# EAGLE board MagSwitch (EAGLE 7.6.0)
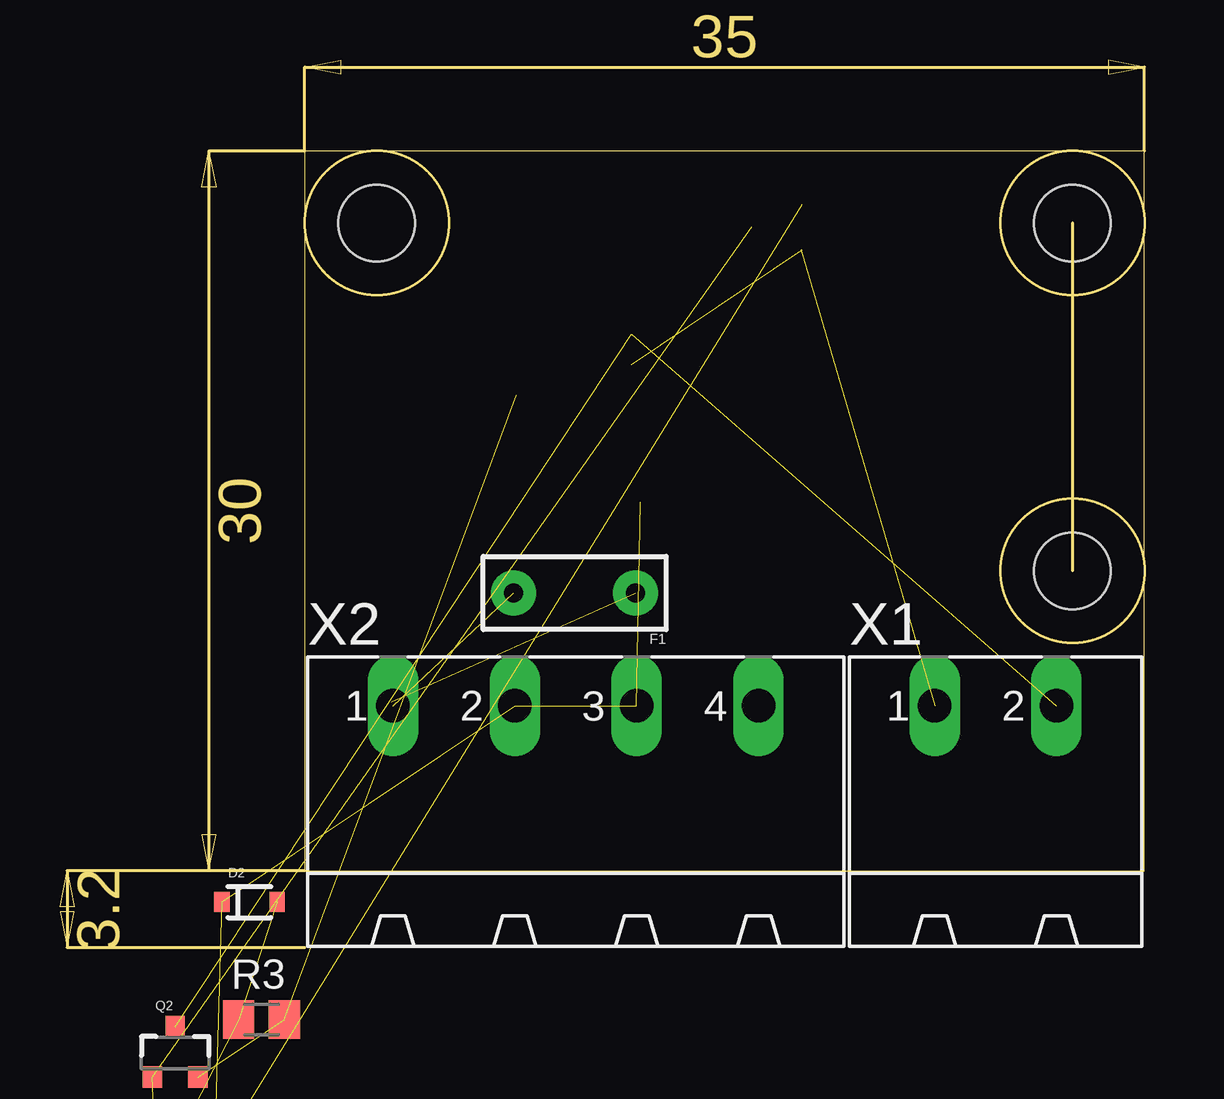
[diagram p0: board, top side]
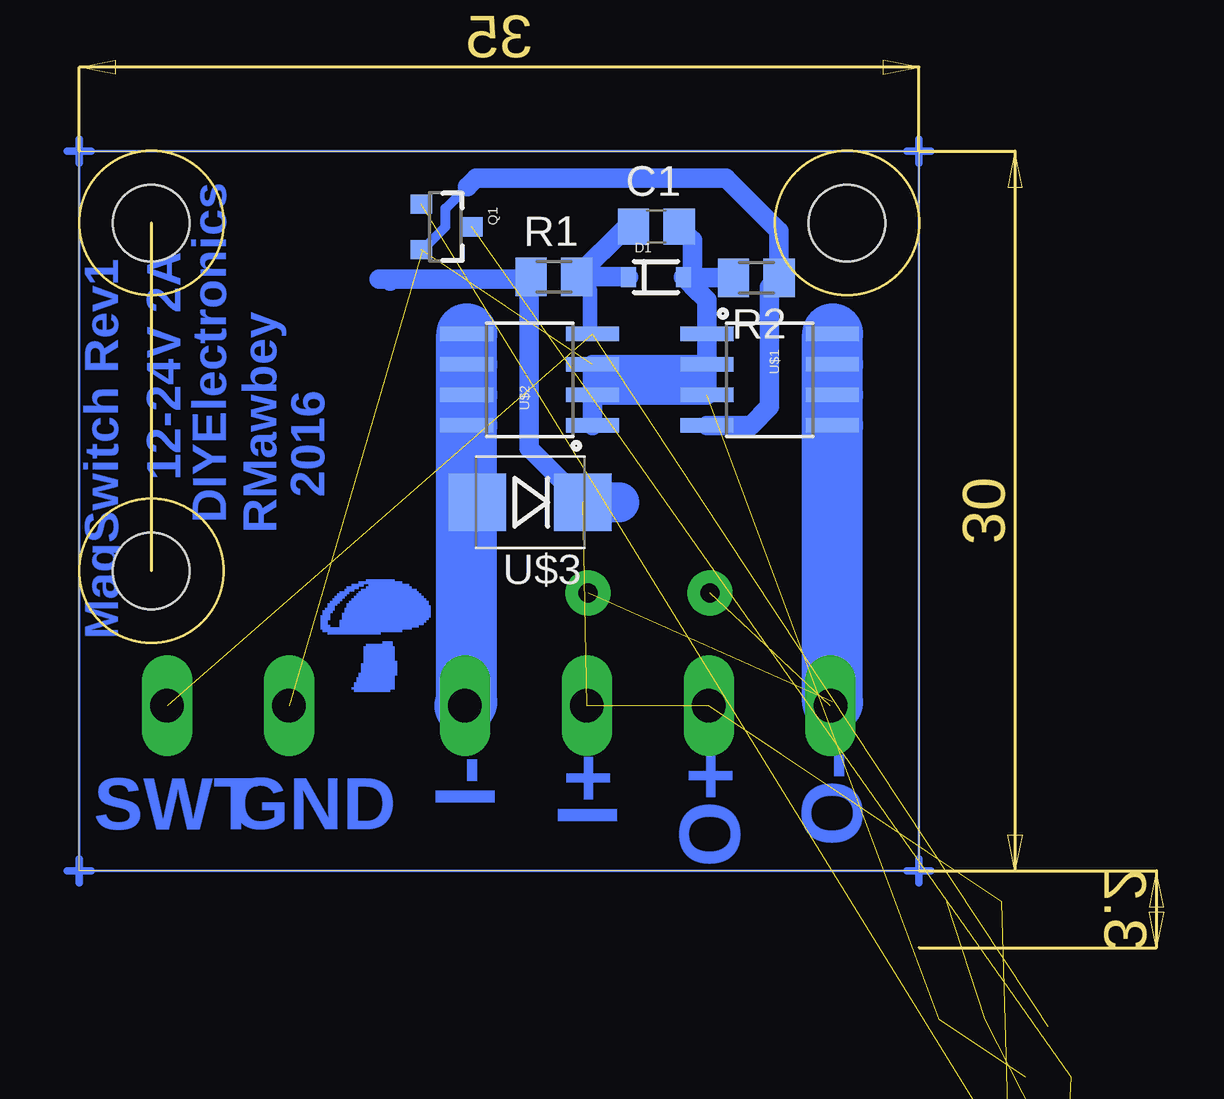
[diagram p1: board, bottom side, seen from below]

Size 35 x 30 mm. Coordinates in mm from the lower left corner, seen from the top.
Outline: 0,0 35,0 35,30 0,30 0,0
Outline: circle at 3,27 radius 3
Outline: circle at 32,27 radius 3
Outline: circle at 32,12.5 radius 3
Copper layers (1*16): Top 0.035mm / dielectric 1.5mm / Bottom 0.035mm
Design rules "default": minimum track width 10mil, minimum drill 24mil, track to track 8mil, track to pad 8mil, pad to pad 8mil, via to via 8mil, smd to smd 8mil, copper to edge 40mil, drill to drill 8mil, minimum pad ring 10mil, minimum via ring 8mil, stop-mask expansion 4mil, vias tented up to drill 0mil, thermal gap 10mil
Holes 3.2 mm at 3,27 32,27 32,12.5

## Footprints (pad centres in the part's own frame; a part is rotated, then mirrored left to right if it is on the bottom)
C0805 = smd 1.3 x 1.5: 1 -0.95,0; 2 0.95,0
SOD-323 = smd 0.63 x 0.83: A 1.15,0; C -1.15,0
PTC = drill 0.8 pad 1.88: P$1 -2.54,0; P$2 2.54,0
SOT23-3 = smd 0.8 x 0.9: 1 -0.95,-1; 2 0.95,-1; 3 0,1.1
M0805 = smd 1.3 x 1.6: 1 -0.95,0; 2 0.95,0
SO08 = smd 0.61 x 2.21: 1 -1.905,-2.616; 2 -0.635,-2.616; 3 0.635,-2.616; 4 1.905,-2.616; 5 1.905,2.616; 6 0.635,2.616; 7 -0.635,2.616; 8 -1.905,2.616
SMB-DIODE = smd 2.4 x 2.4: A 2.2,0; C -2.2,0
MSTBA2 = drill 1.397 long: 1 -2.54,5.08; 2 2.54,5.08
MSTBA4 = drill 1.397 long: 1 -7.62,5.08; 2 -2.54,5.08; 3 2.54,5.08; 4 7.62,5.08

## Placement (x,y rotation side)
C1  100nF  [C0805]  10.95,26.85 0 bottom
D1  DIODE-ZENER15V  [SOD-323]  10.96,24.75 0 bottom
D2  DIODE-ZENER8V  [SOD-323]  -2.3,-1.3 0 top
F1  PTCPTH  [PTC]  11.25,11.58 180 top
Q1  MMBT2222A  [SOT23-3]  19.74,26.84 270 bottom
Q2  MMBT2222A  [SOT23-3]  -5.4,-7.6 0 top  (outside the outline)
R1  5k6  [M0805]  15.21,24.77 0 bottom
R2  10k  [M0805]  6.78,24.72 180 bottom
R3  10k  [M0805]  -1.8,-6.2 0 top  (outside the outline)
R4  4k7  [M0805]  -4.9,-12.3 0 top  (outside the outline)
R5  4k7  [M0805]  -4.9,-18.4 0 top  (outside the outline)
U$1  DMG4466SSS  [SO08]  6.22,20.47 270 bottom
U$2  DMG4466SSS  [SO08]  16.23,20.47 90 bottom
U$3  DIODE_TVS_BISM6T30CAY  [SMB-DIODE]  16.21,15.37 180 bottom
U$4  SHROOM5MM  [SHROOM]  25,7.5 0 bottom
X1  MSTBA2  [MSTBA2]  28.8,1.8 0 top
X2  MSTBA4  [MSTBA4]  11.3,1.8 0 top

## Library data of the parts
C1 R1-R5 = resistor
D1 D2 U$1-U$4 = RobThePyro
F1 = SparkFun-PowerIC
Q1 Q2 = SparkFun-DiscreteSemi; PROD_ID: TRANS-08049
X1 = con-phoenix-508; MF: FARNELL; MPN: 1757242; OC_FARNELL: 3705171; OC_NEWARK: 71C4161
X2 = con-phoenix-508; MF: FARNELL; MPN: 1757268; OC_FARNELL: 3705195; OC_NEWARK: 71C4163

## Nets
+24V: D2.C R1.1 R5.2 U$3.C X2.2 X2.3
GND: U$2.5 U$2.6 U$2.7 U$2.8 U$3.A X2.4
N$1: D2.A R3.1 R4.1
N$2: Q1.1 R4.2
N$3: C1.2 D1.A Q1.2 Q2.2 R2.2 R3.2 U$1.1 U$1.2 U$1.3 U$2.1 U$2.2 U$2.3
N$4: R2.1 U$1.4 X1.1
N$6: F1.P$2 X2.1
N$7: C1.1 D1.C Q2.3 R1.2 U$2.4 X1.2
N$13: Q1.3 Q2.1 R5.1
OUT-: F1.P$1 U$1.5 U$1.6 U$1.7 U$1.8

## Tracks (layer width: path | path; a pad name or v marks a point on that pad's centre or on a via)
+24V  (4 unrouted)
  Bottom 0.813: 16.26,24.67 R1.1 | 16.26,24.67 21.95,24.67 | 21.95,24.67 22.5,24.67 | 22.04,24.58 21.95,24.67 | 16.26,24.67 16.26,17.62 U$3.C
  Bottom 1.676: U$3.C 12.5,15.37
GND
  Bottom 1.676: U$3.A 18.41,15.25 18.85,14.81
  Bottom 2.54: X2.4 18.85,7.03 18.85,14.81 U$2.8 U$2.7 U$2.6 U$2.5
N$1  (2 unrouted)
N$2  (1 unrouted)
N$3  (3 unrouted)
  Bottom 0.813: 9.43,24.37 D1.A 9.78,24.72 R2.2 | 9.43,24.37 8.84,23.78 U$1.1 U$1.2 | C1.2 9.43,26.29 9.43,24.37 | U$1.2 8.84,20.47 | 8.84,20.47 U$1.3 U$2.2 | U$1.2 U$2.3 13.61,20.47 | U$2.1 U$2.2 | 13.61,20.47 13.61,19.89 | 13.61,19.89 U$2.2 | U$2.2 13.56,19.79 13.56,19.84 13.61,19.89 | 8.84,20.47 13.61,20.47
N$4  (1 unrouted)
  Bottom 0.406: 20.69,25.89 19.74,26.85 19.74,27.61 18.82,28.52
  Bottom 0.61: 8.83,18.55 U$1.4
  Bottom 0.813: 18.82,28.52 18.47,28.88 8.05,28.88 5.83,26.66 R2.1 6.22,24.32 6.22,19.36 7.01,18.57 U$1.4
N$5
  Bottom 0.1: 0,30 35,30 35,0 0,0 0,30
  Bottom 0.305: 0,29.5 0,30 0,30.5 | 35.5,0 35,0 34.5,0
N$6  (1 unrouted)
N$7  (2 unrouted)
  Bottom 0.61: R1.2 13.72,24.22 13.72,22.48 U$2.4
  Bottom 0.813: D1.C 12.12,24.77 R1.2 12.18,26.85 C1.1
N$8
  Bottom 0.305: -0.5,30 0.5,30
N$9
  Bottom 0.305: 35,29.5 35,30.5
N$10
  Bottom 0.305: 35.5,30 34.5,30
N$11
  Bottom 0.305: 0,0.5 0,-0.5
N$12
  Bottom 0.305: -0.5,0 0.5,0
N$13  (2 unrouted)
N$14
  Bottom 0.305: 35,0.5 35,-0.5
OUT-  (1 unrouted)
  Bottom 2.54: 3.61,7.03 U$1.5 U$1.6 U$1.7 U$1.8
(copper drawn outside any net)
  shapes: Bottom circle x3

## Text on the board
Bottom: DIYElectronics | 12-24V 2A | MagSwitch Rev1 | RMawbey | 2016 | O- | O+ | I+ | I- | GND | SWT